# Altium PCB M1-Test-Board.PcbDoc (part 4 of 5)
Units mil, origin at the board's own origin, x right, y up, seen from the top; angles counter-clockwise.
Board outline 3977 x 5000 mil, 4 copper layers (Top, GND Layer 2, Power Layer 3, Bottom), stack 60 mil thick; 191 components, 124 nets, 579 pads, 189 vias.
Unrouted connection lines stored in the file: 80.
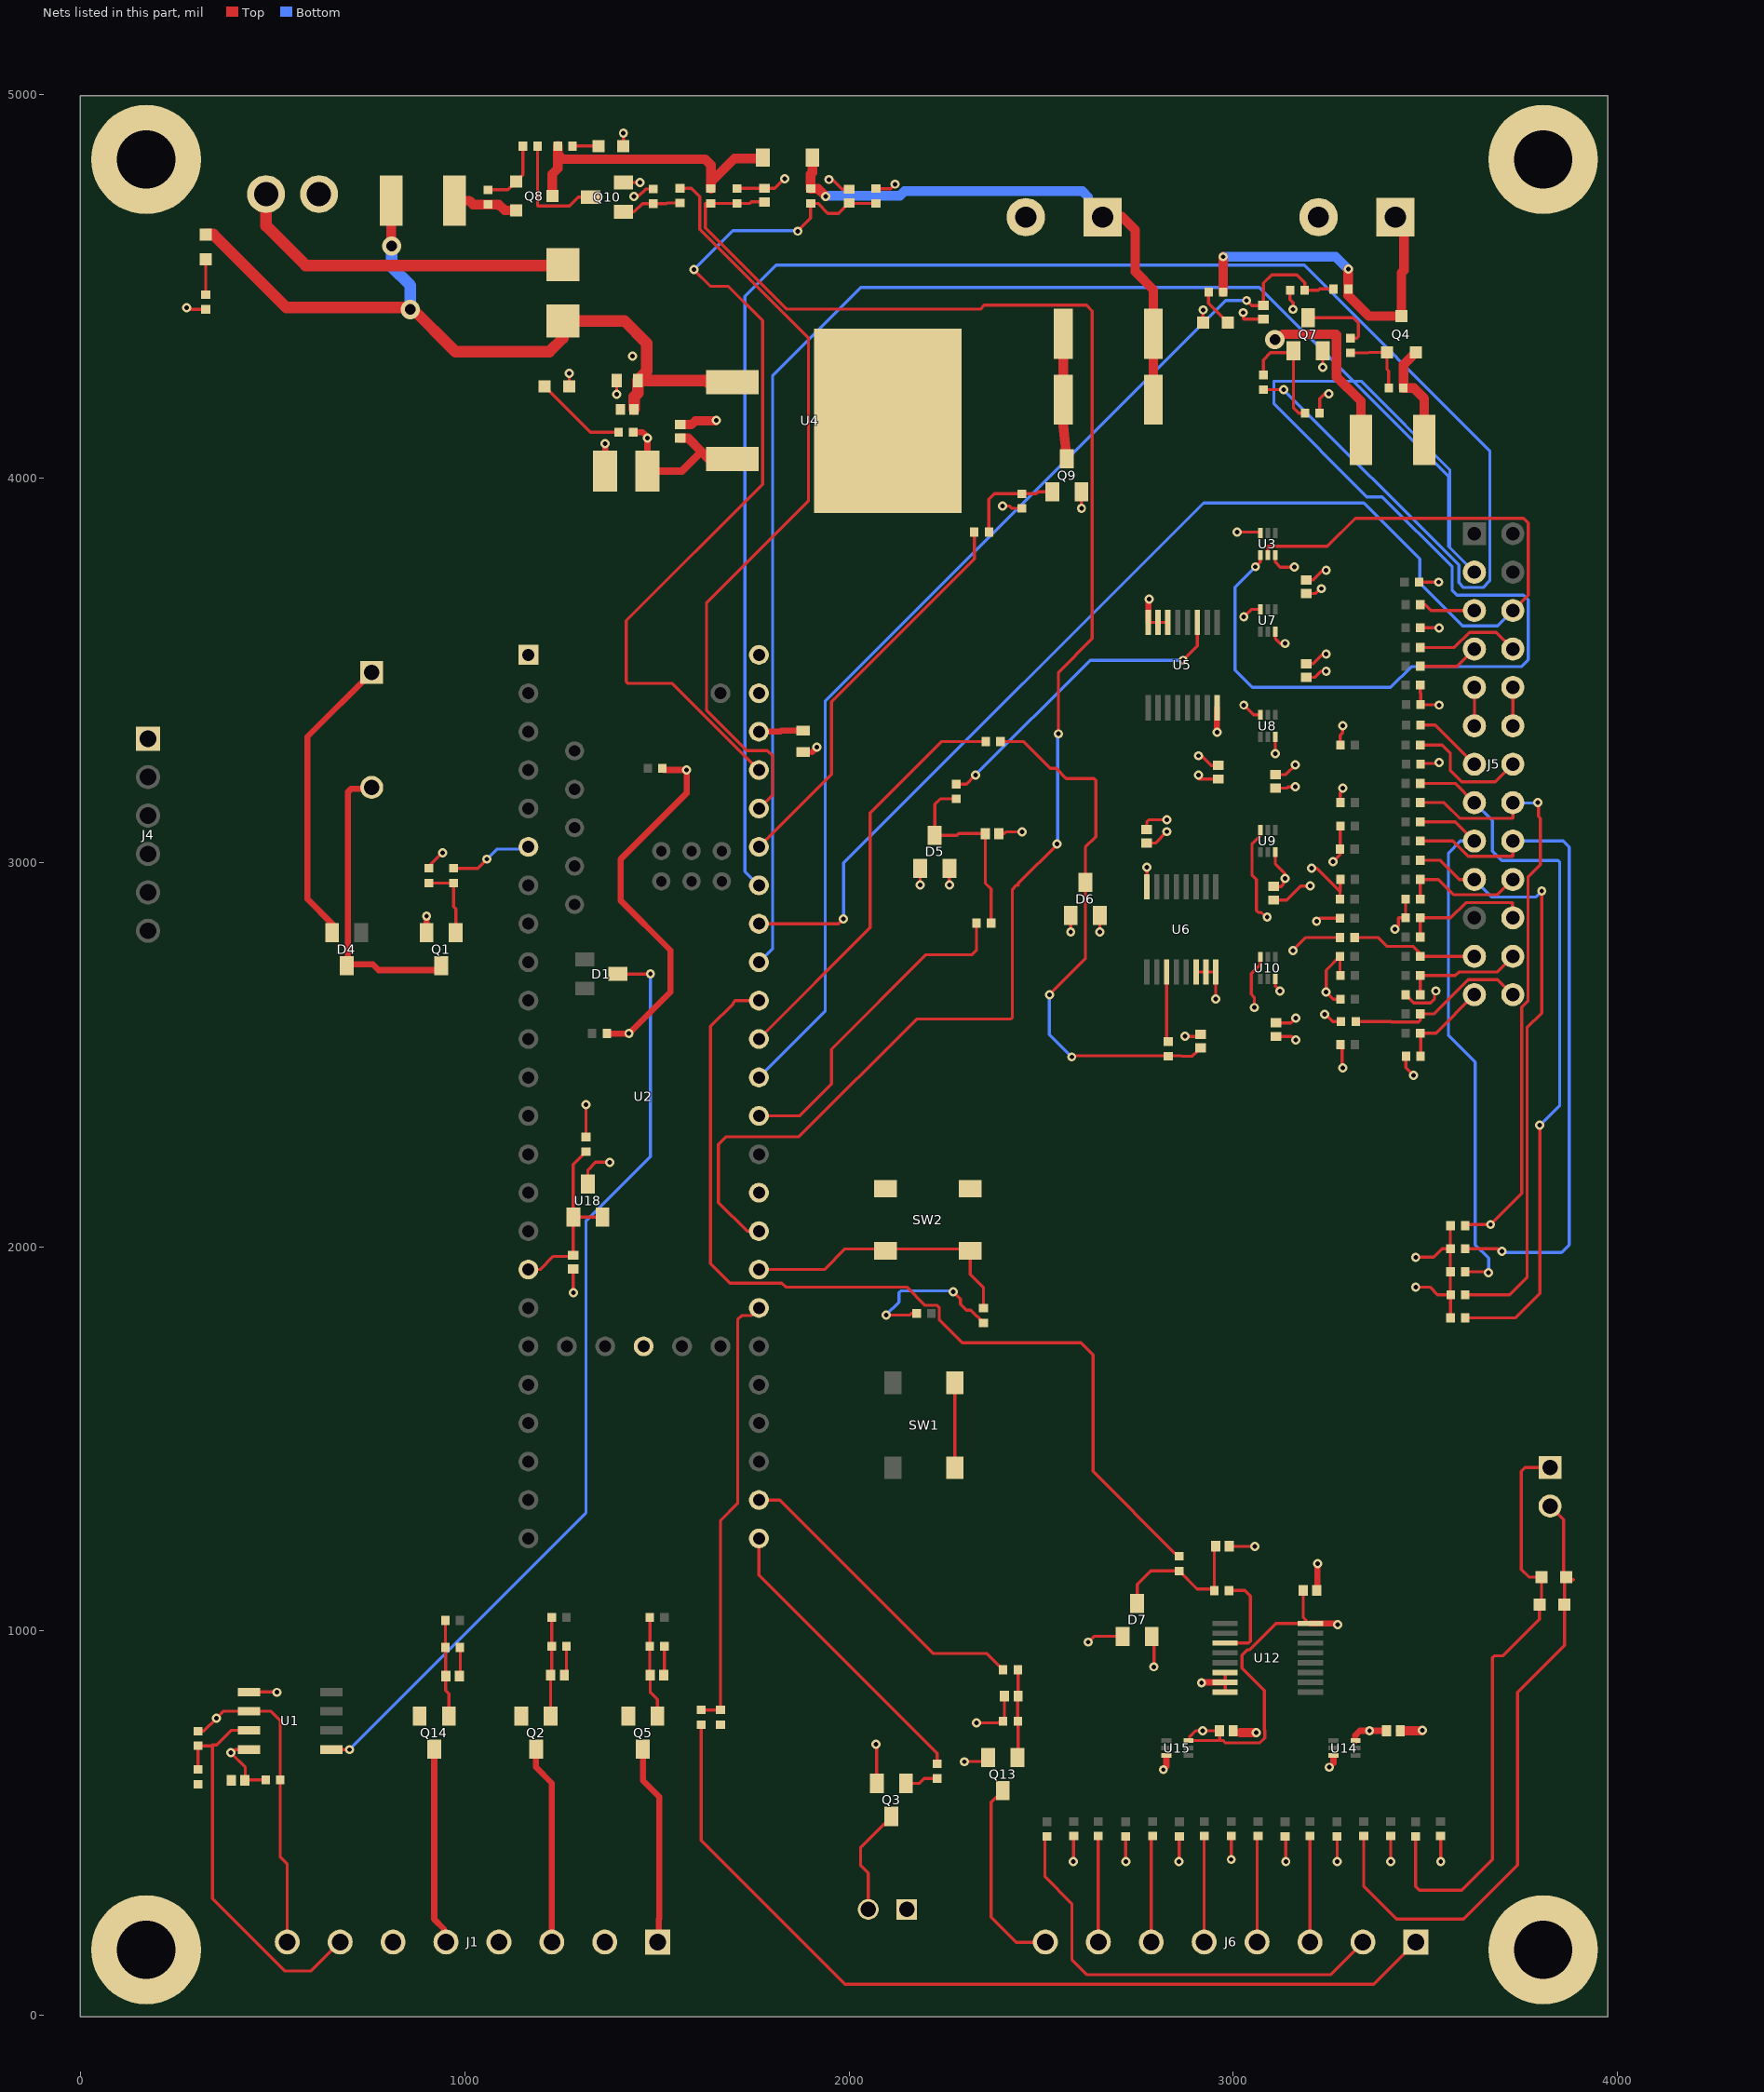
[diagram p4: the nets of this part, all layers, seen from the top]

## Via types
v1: diameter 24, hole 12, Top to Bottom, 186 vias
v2: diameter 50, hole 28, Top to Bottom, 3 vias

## Nets (pads, with @x,y where several pads share a name; then routed paths per layer and width w, separated by ;. In a path a pad name is that pad's centre, name@x,y a point inside that pad or via, vN(x,y) a via of type N, cw(c..) or ccw(c..) an arc to the next point about the centre after c; other vN are vias at no path point) (continued)
NetQ3_1: (continued)
  Top w8: Q3.1@2148,603 2182,603 2194.91,615.91 R85.2@2229.03,615.91
NetQ4_1: Q4.1 R88.2 R92.1 | length 190.5
  Top w8: R92.1@3305,4326.81 3352,4326.81 3352.94,4327.76 Q4.1@3400.48,4327.76 3400.48,4283.52 3405,4279 R88.2@3405,4235
NetQ7_1: Q7.1 R94.2 R96.1 | length 309.5
  Top w8: R94.2@3078.5,4269.09 3078.5,4308.5 3097,4327 Q7.1@3157,4327 ; Q7.1@3157,4332 Q7.1@3157,4327 ; R96.1@3186.81,4170 3170.5,4170 3157,4183.5 Q7.1@3157,4327
NetQ7_3: Q7.3 R92.2 | length 194.7
  Top w8: Q7.3@3195,4418 3312.5,4418 3326,4404.5 3326,4369.16 3321.84,4365 R92.2@3305,4365
NetQ8_1: Q8.1 R100.2 R104.1 | length 181.6
  Top w8: R100.2@1060,4751.22 1111.57,4751.22 Q8.1@1132.76,4772.4 1150.91,4790.55 R104.1@1150.91,4865
NetQ9_1: Q9.1 R99.2 R105.1 | length 258.8
  Top w8: R99.2@2364.09,3860 2364.09,3946 2378.09,3960 R105.1@2450,3960 2487,3960 2492,3965 Q9.1@2529,3965
NetQ9_3: Q9.3 R97.2 R98.2 | length 325.5
  Top w25: R97.2@2557.87,4376.02 R98.2@2557.87,4205 2557.87,4137.13 Q9.3@2567,4051
NetQ10_1: Q10.1 R108.2 R109.1 | length 156.4
  Top w8: Q10.1@1413,4694.13 1441,4694.13 1461.87,4715 R109.1@1490,4715 1524,4715 1525.81,4716.81 R108.2@1560,4716.81
NetQ10_3: Q10.3 R104.2 | length 302.9
  Top w8: R104.2@1189.09,4865 1189.09,4710 1190.09,4709 1272,4709 1295.13,4732.13 Q10.3@1327,4732.13
NetR71_2: R71.2 R72.1 U2.39 | length 1151.5
  Top w8: R72.1@1615,794.09 1663.39,794.09 1665.2,795.91 1665.2,1287.06 1710,1331.87 1710,1810 1720.99,1820.99 1745.56,1820.99 U2.39@1765.2,1840.63
NetR85_1: R85.1 U2.33 | length 778.7
  Top w8: U2.33@1765.2,1240.63 1765.2,1144.8 2229.03,680.97 R85.1@2229.03,654.1
NetR94_1: R94.1 U2.20 | length 4896.4
  Top w8: R94.1@3078.5,4230.91 v1(3130.95,4230.91)
  Bottom w8: U2.20@1765.2,2940.63 1729,2976.83 1729,4474 1810,4555 3185,4555 3668,4072 3668,3733.5 3650.5,3716 3600,3716 3587.5,3728.5 3587.5,3774.36 v1(3130.95,4230.91)
NetR99_1: R99.1 U2.21 | length 1051.6
  Top w8: U2.21@1765.2,3040.63 1954,3229.43 1954,3418.5 2325.91,3790.41 R99.1@2325.91,3860
NetR108_1: R108.1 U2.22 | length 1997.6
  Top w8: R108.1@1560,4755 1589.5,4755 1611,4733.5 1611,4647.92 1894.47,4364.45 1894.47,3942.19 1629,3676.72 1629,3395.92 1733.92,3291 1787.5,3291 1801,3277.5 1801,3176.43 U2.22@1765.2,3140.63
NetR111_2: R111.2 U5.3 | length 837.8
  Top w8: R111.2@2279,3204.09 2305.09,3204.09 v1(2329,3228) ; v1(2869.27,3526.5) 2906.77,3564 U5.3@2906.77,3625
  Bottom w8: v1(2329,3228) 2627.5,3526.5 v1(2869.27,3526.5)
NetR112_2: R112.2 U6.3 | length 180
  Top w8: R112.2@2826.61,2535 U6.3@2826.61,2715
NetR114_2: R114.2 U12.3 | length 247.4
  Top w8: U12.3@2979,968.39 3040.31,968.39 3045,973.07 3045,1090.75 3030.75,1105 R114.2@2989.09,1105
NetR118_1: R118.1 U2.14 | length 868.6
  Top w8: U2.14@1765.2,2340.63 1870.63,2340.63 1954,2424 1954,2514 2200,2760 2320,2760 2331.6,2771.6 R118.1@2331.6,2842.52
NetR119_1: R119.1 U2.16 | length 1086.4
  Top w8: U2.16@1765.2,2540.63 2055,2830.43 2055,3129 2241,3315 R119.1@2355.91,3315
NetR120_1: R120.1 U2.17 | length 2504.5
  Top w8: U2.17@1765.2,2640.63 1703.66,2640.63 1698.03,2635 1698.03,2632.03 1639.45,2573.45 1639.45,1956.05 1690.12,1905.38 1824.93,1905.38 1835.31,1895 2150,1895 2197.53,1847.47 2229.05,1847.47 2234.62,1841.91 2234.62,1810.38 2295,1750 2603.95,1750 2635,1718.95 2635,1415 2848.88,1201.12 2852.07,1201.12 R120.1@2859.1,1194.09